# Allegro board power_amplifier.brd
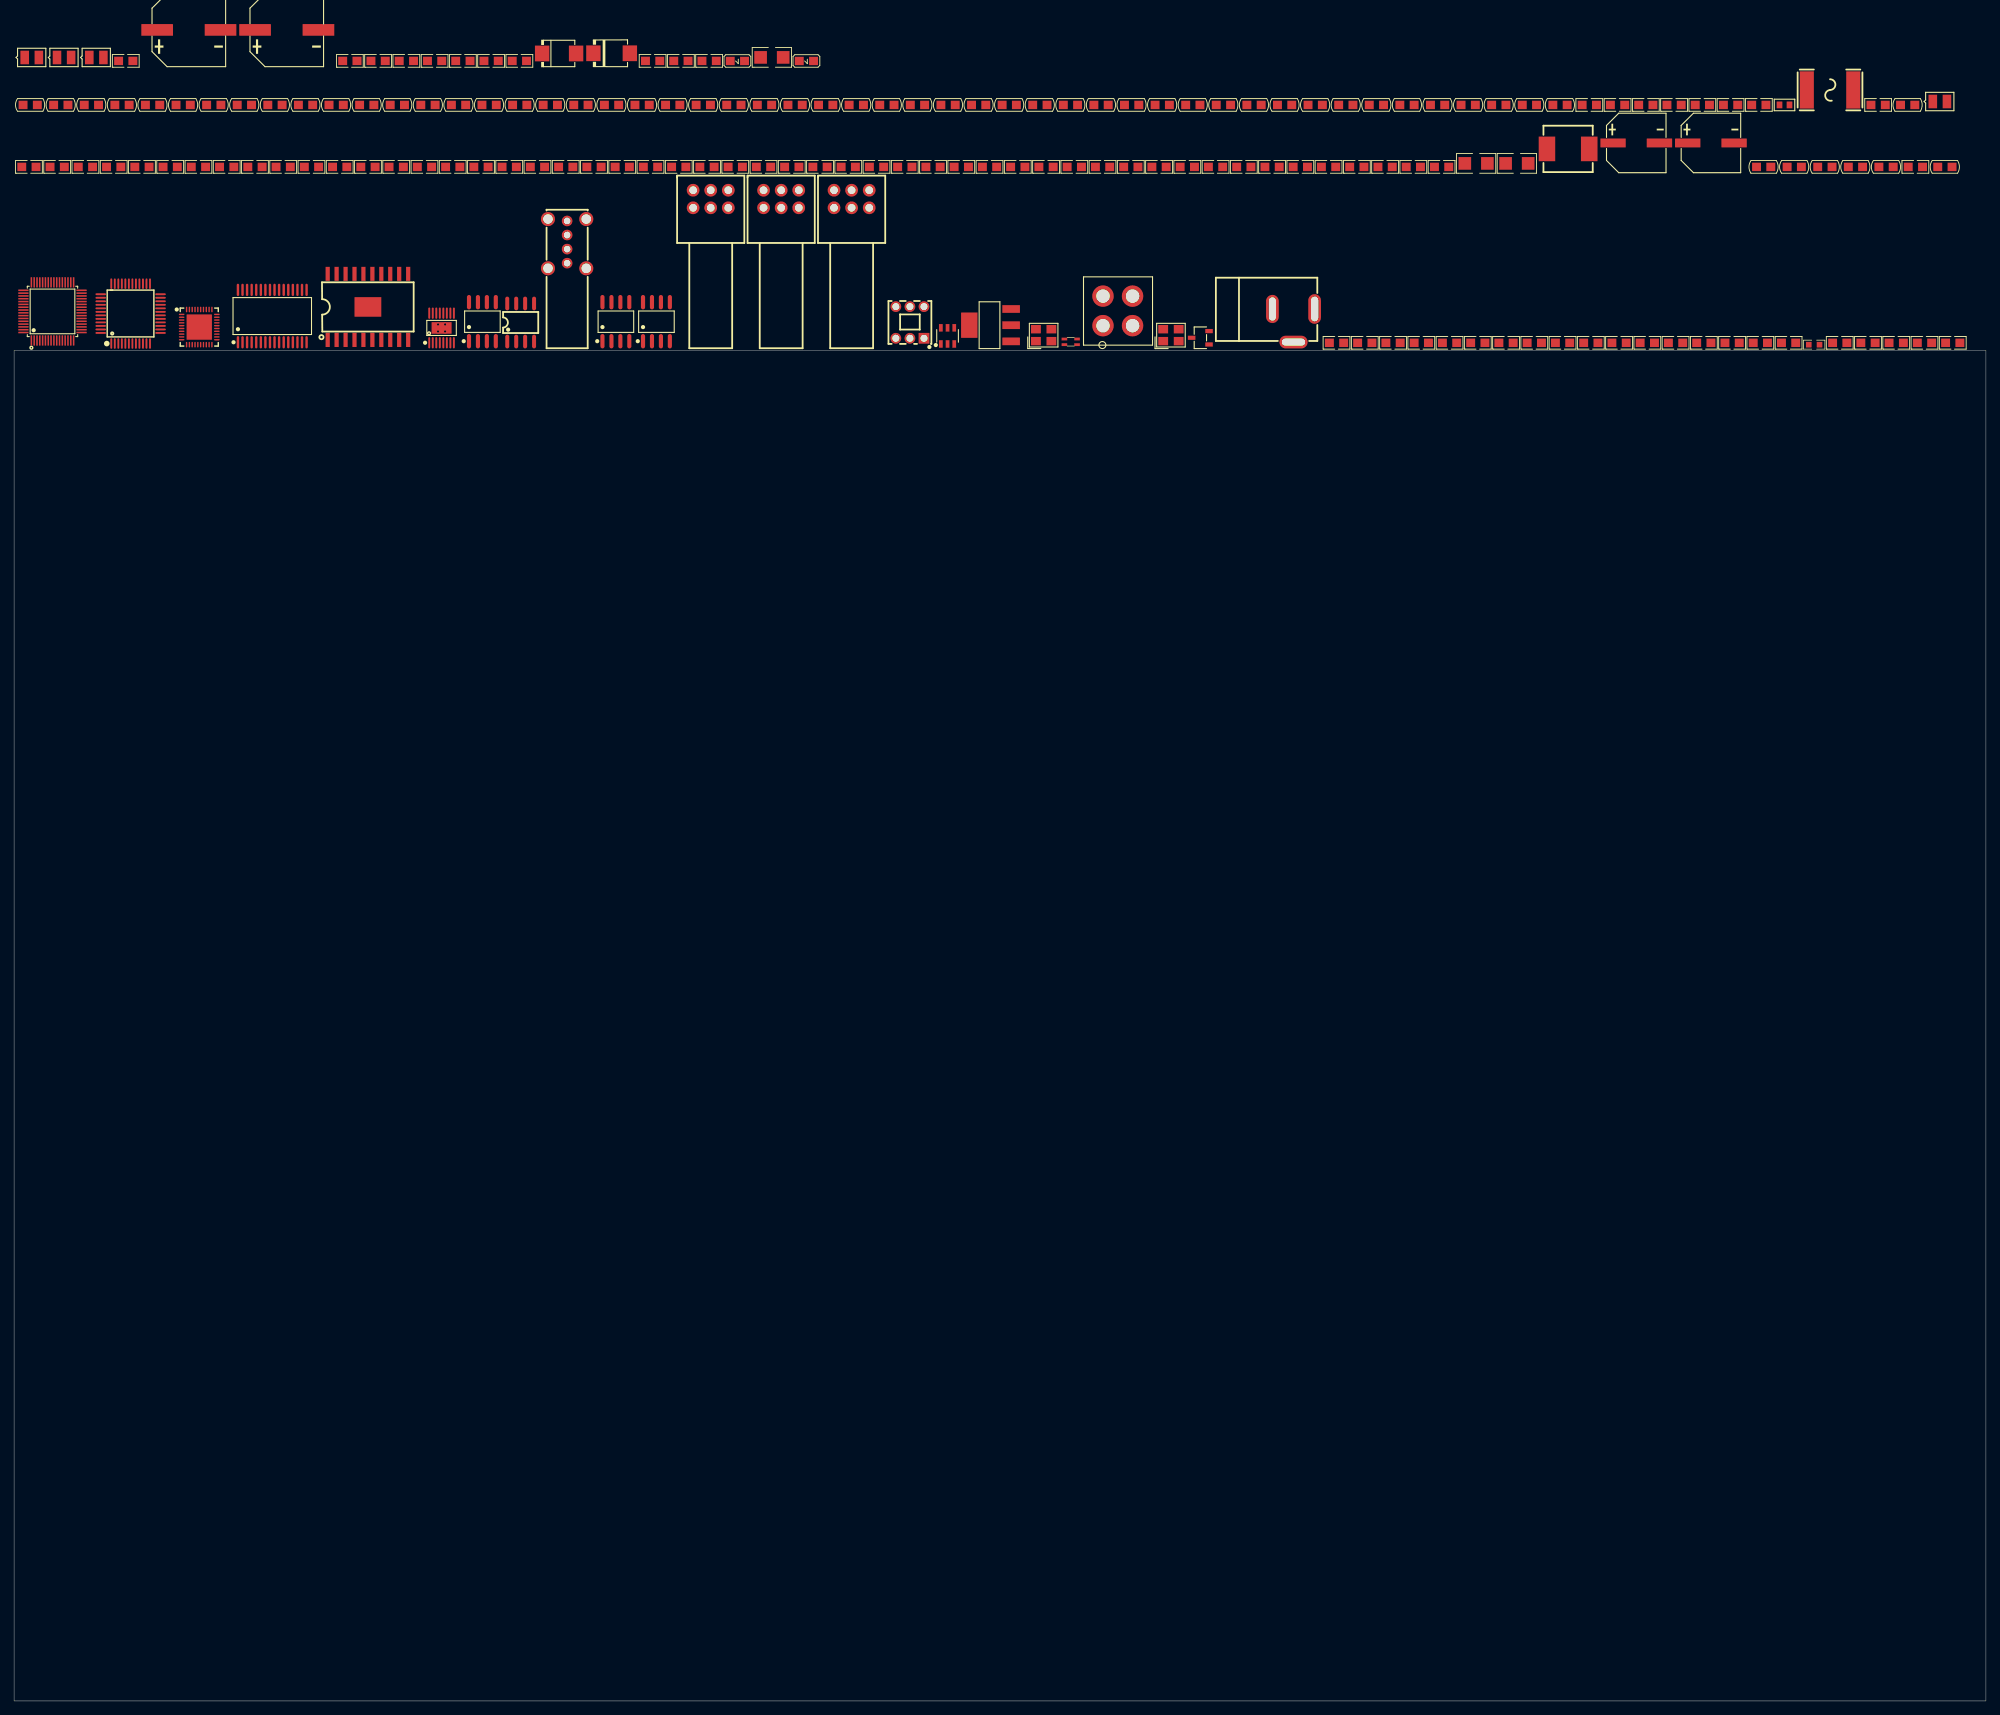
[diagram p0: board, top side]
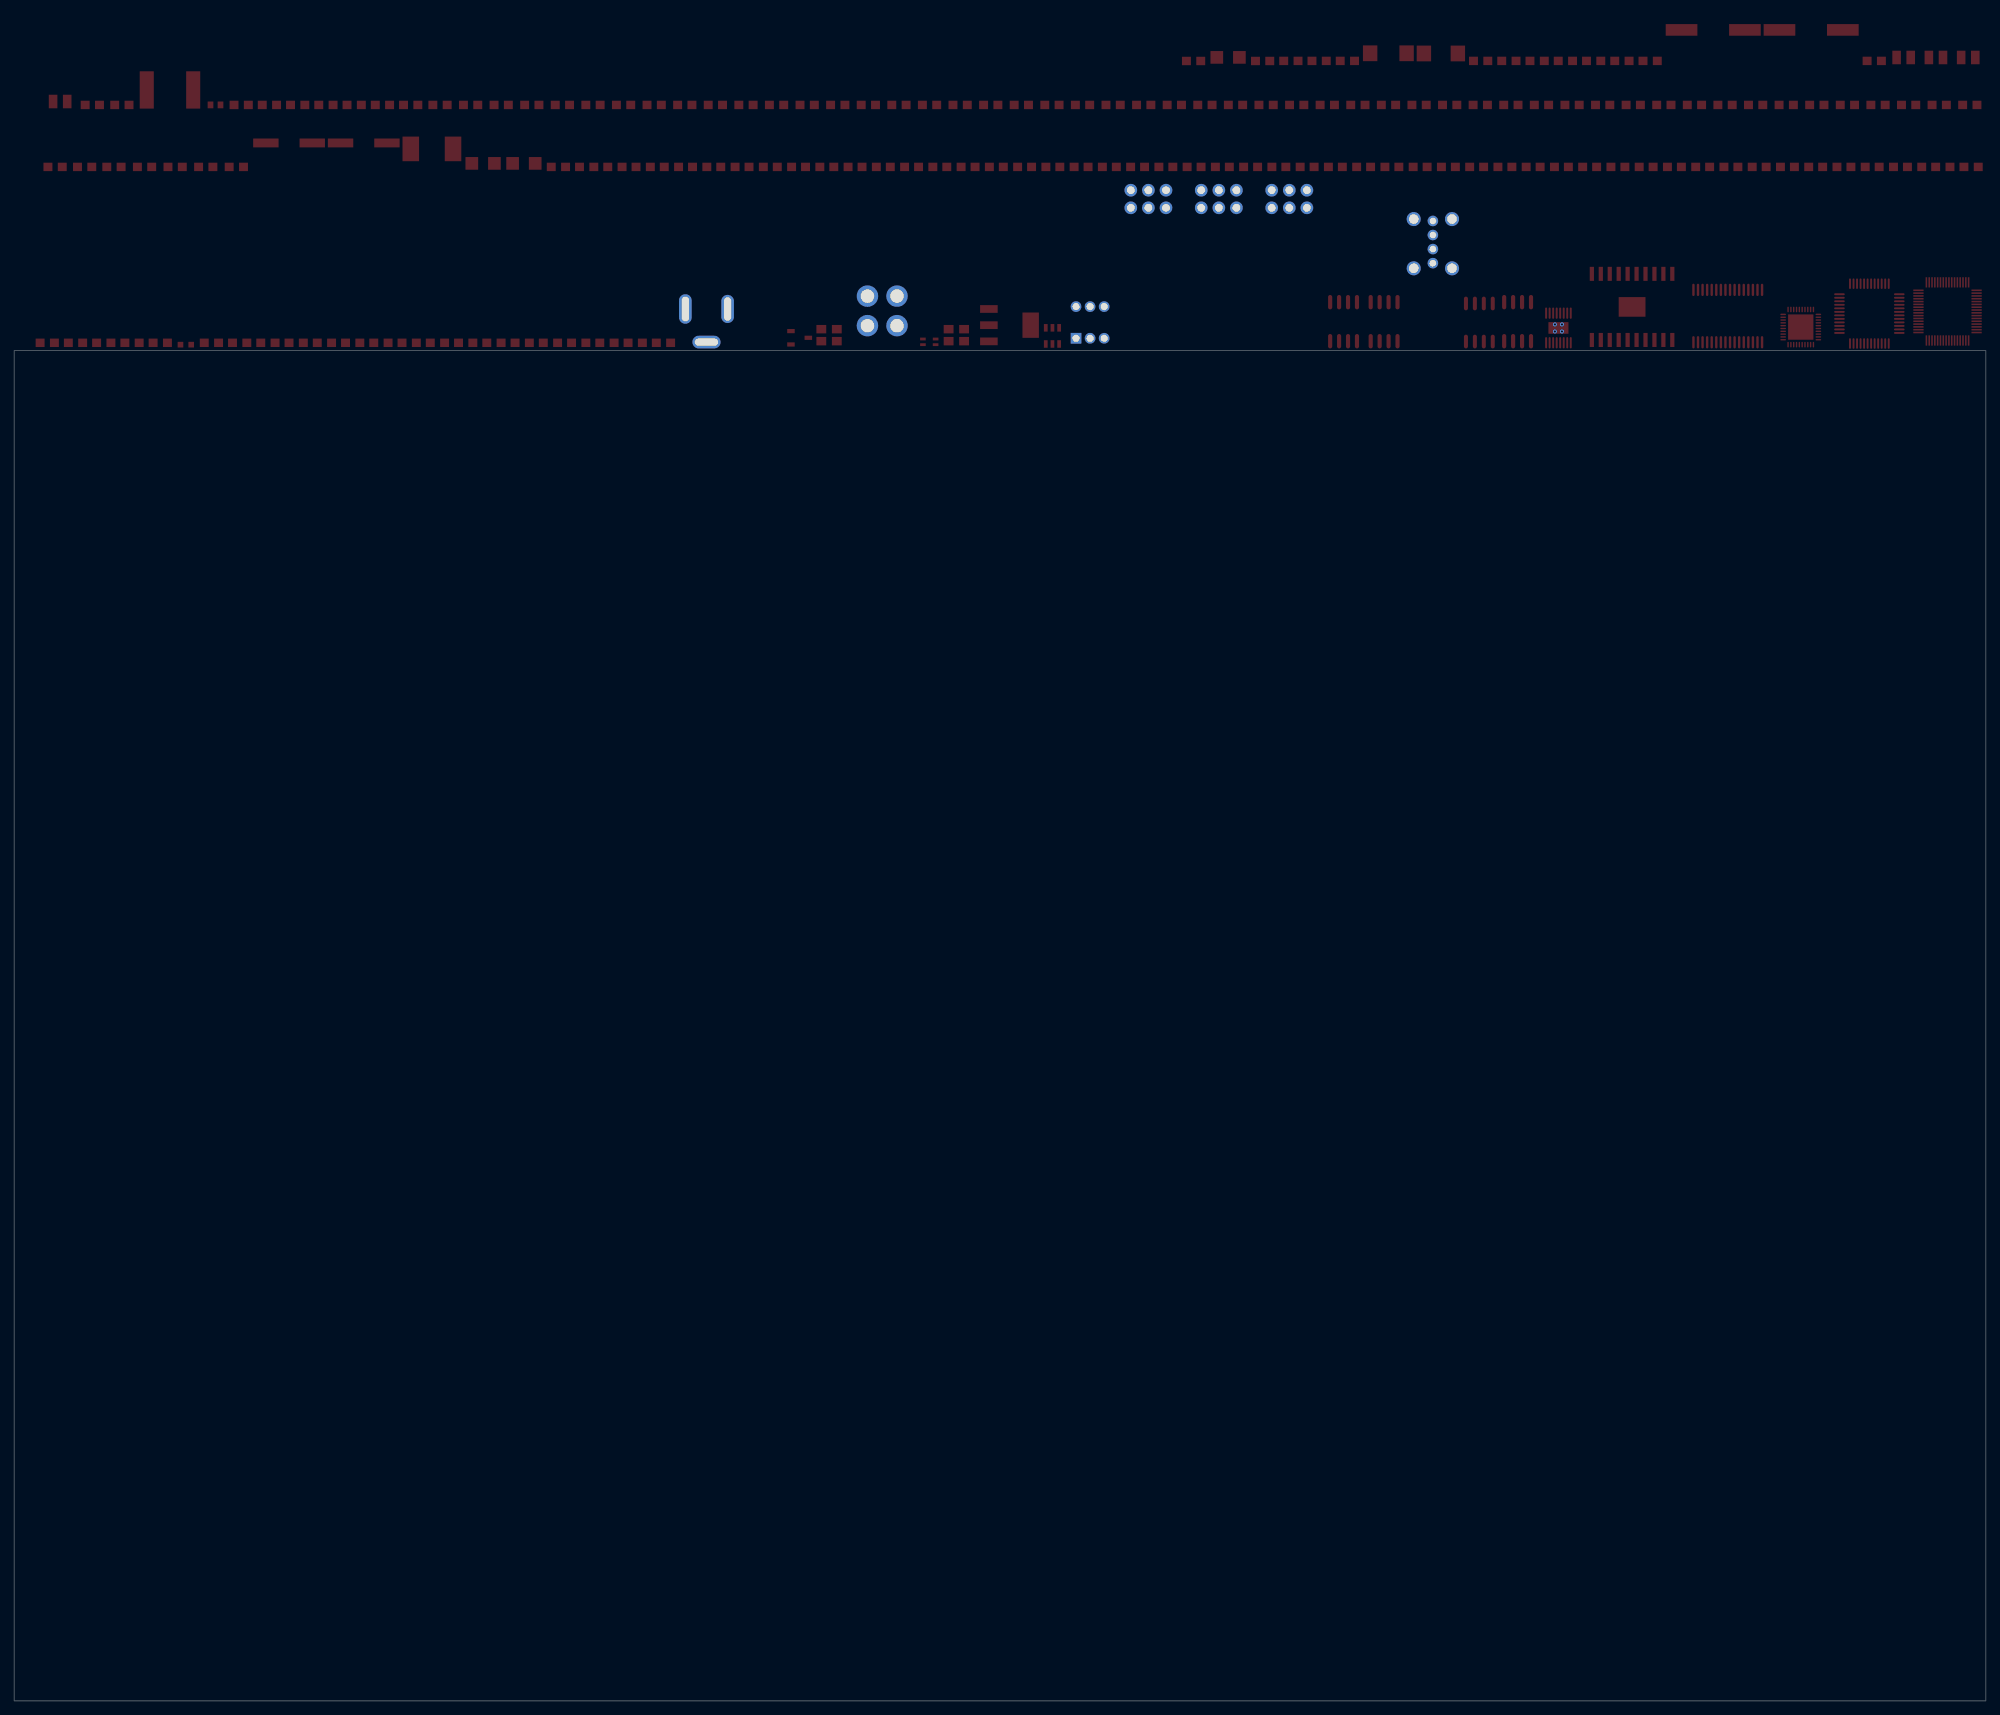
[diagram p1: board, bottom side, seen from below]

Outline 280.09 x 191.92 mm; copper layers: TOP, BOTTOM. Coordinates in mm from the lower left corner of the outline.
Outline path: 0,191.92 0,0 280.09,0 280.09,191.92 0,191.92

## Design rules (mm)
constraint set DEFAULT: min track width 0.127

## Placement (name value [footprint] x y rotation side)
C1  *  [C1206]  107.64 233.59 0 top
C2  *  [C0805]  207.91 193.02 0 top
C3  *  [C0805]  98.73 233.09 0 top
C4  *  [C1206]  207.67 218.52 0 top
C5  *  [C0805]  94.71 233.09 0 top
C6  *  [C1206]  213.46 218.52 0 top
C7  *  [C0805]  90.7 233.09 0 top
C8  *  [C0805]  142.57 218.02 0 top
C9  *  [C0805]  71.77 233.09 0 top
C10  *  [C0805]  227.98 193.02 0 top
C11  *  [C0805]  231.99 193.02 0 top
C12  *  [C0805]  146.58 218.02 0 top
C13  *  [C0805]  67.76 233.09 0 top
C14  *  [C0805]  63.75 233.09 0 top
C15  *  [C0805]  59.73 233.09 0 top
C16  *  [C0805]  58.29 218.02 0 top
C17  -  [CAP-SMD_BD10_0-L10_3-W10_3-FD]  24.82 237.5 0 top
C18  *  [C0805]  150.6 218.02 0 top
C19  -  [CAP-SMD_BD10_0-L10_3-W10_3-FD]  38.73 237.5 0 top
C20  *  [C0805]  55.72 233.09 0 top
C21  *  [C0805]  62.31 218.02 0 top
C22  *  [C0805]  66.32 218.02 0 top
C23  *  [C0805]  51.71 233.09 0 top
C24  *  [C0805]  47.69 233.09 0 top
C25  *  [C0805]  154.61 218.02 0 top
C26  *  [C0805]  158.62 218.02 0 top
C27  *  [C0805]  70.33 218.02 0 top
C28  *  [C0805]  110.46 218.02 0 top
C29  *  [C0805]  202.77 218.02 0 top
C30  *  [C0805]  162.64 218.02 0 top
C31  *  [C0805]  166.65 218.02 0 top
C32  *  [C0805]  244.03 193.02 0 top
C33  *  [C0805]  248.04 193.02 0 top
C34  *  [C0805]  252.06 193.02 0 top
C35  *  [C0805]  267.35 193.02 0 top
C36  *  [C0603]  255.69 192.76 0 top
C37  *  [C0805]  259.32 193.02 0 top
C38  *  [C0805]  263.33 193.02 0 top
C39  *  [C0805]  215.94 193.02 0 top
C40  *  [C0805]  54.28 218.02 0 top
C41  *  [C0805]  223.96 193.02 0 top
C42  *  [C0805]  271.36 193.02 0 top
C43  *  [C0805]  275.37 193.02 0 top
C44  *  [C0805]  15.86 233.09 0 top
C45  *  [C0805]  211.92 193.02 0 top
C46  *  [C0805]  264.78 226.83 0 top
C47  *  [C0805]  236 193.02 0 top
C48  *  [C0805]  240.02 193.02 0 top
C49  *  [C0805]  247.83 226.83 0 top
C50  *  [C0805]  243.82 226.83 0 top
C51  *  [C0805]  239.8 226.83 0 top
C52  *  [C0805]  235.79 226.83 0 top
C53  *  [C0805]  231.78 226.83 0 top
C54  *  [C0805]  227.76 226.83 0 top
C55  *  [C0805]  18.16 218.02 0 top
C56  *  [C0805]  22.17 218.02 0 top
C57  *  [C0805]  223.75 226.83 0 top
C58  *  [C0805]  270.07 218.02 0 top
C59  *  [C0805]  170.66 218.02 0 top
C60  *  [C0805]  174.68 218.02 0 top
C61  *  [C0805]  114.48 218.02 0 top
C62  *  [C0805]  118.49 218.02 0 top
C63  *  [C0805]  26.19 218.02 0 top
C64  *  [C0805]  30.2 218.02 0 top
C65  *  [C0805]  178.69 218.02 0 top
C66  *  [C0805]  182.7 218.02 0 top
C67  *  [C0805]  219.95 193.02 0 top
C68  *  [C0805]  187.85 193.02 0 top
C69  *  [C0805]  199.89 193.02 0 top
C70  *  [C0805]  195.87 193.02 0 top
C71  *  [C0805]  203.9 193.02 0 top
C72  *  [C0805]  191.86 193.02 0 top
C73  *  [C0805]  122.5 218.02 0 top
C74  *  [C0805]  126.52 218.02 0 top
C75  *  [C0805]  130.53 218.02 0 top
C76  *  [C0805]  134.54 218.02 0 top
C77  *  [C0805]  138.56 218.02 0 top
C78  *  [C0805]  78.36 218.02 0 top
C79  *  [C0805]  98.43 218.02 0 top
C80  *  [C0805]  34.21 218.02 0 top
C81  *  [C0805]  38.23 218.02 0 top
C82  *  [C0805]  102.44 218.02 0 top
C83  *  [C0805]  106.45 218.02 0 top
C84  -  [CAP-SMD_BD8_0-L8_3-W8_3-LS9_0-FD]  230.42 221.43 0 top
C85  -  [CAP-SMD_BD8_0-L8_3-W8_3-LS9_0-FD]  241.03 221.43 0 top
C86  *  [C0805]  186.72 218.02 0 top
C87  *  [C0805]  190.73 218.02 0 top
C88  *  [C0805]  194.74 218.02 0 top
C89  *  [C0805]  198.75 218.02 0 top
C90  *  [C0805]  2.11 218.02 0 top
C91  *  [C0805]  6.12 218.02 0 top
C92  *  [C0805]  10.13 218.02 0 top
C93  *  [C0805]  14.15 218.02 0 top
C94  *  [C0805]  42.24 218.02 0 top
C95  *  [C0805]  46.25 218.02 0 top
C96  *  [C0805]  50.27 218.02 0 top
C97  *  [C0805]  74.35 218.02 0 top
C98  *  [C0805]  82.37 218.02 0 top
C99  *  [C0805]  86.39 218.02 0 top
C100  *  [C0805]  90.4 218.02 0 top
C101  *  [C0805]  94.41 218.02 0 top
D1  -  [SOT-23-6_L2_9-W1_6-P0_95-LS2_8-BL]  132.59 194.01 0 top
D2  -  [DC-IN-TH_DC-005-5A-2_5]  181.73 195.48 0 top
D3  -  [SMB_L4_6-W3_6-LS5_4-RD]  77.42 234.14 0 top
F1  -  [F2920]  257.94 228.96 0 top
L1  *  [L0805]  112.54 233.08 0 top
L2  *  [L0805]  102.74 233.08 0 top
L3  -  [SMC0603]  250.76 226.83 0 top
L4  -  [IND-SMD_4P-L2_0-W1_2-TL]  150.09 193.16 0 top
L5  -  [IND-SMD_L7_3-W6_8]  220.74 220.58 0 top
L6  -  [SMD0805]  272.54 227.32 0 top
L7  -  [SMD0805]  1.51 233.58 0 top
L8  -  [SMD0805]  6.1 233.58 0 top
L9  -  [SMD0805]  10.68 233.58 0 top
R1  *  [R0805]  24.02 226.83 0 top
R2  *  [R0805]  28.36 226.83 0 top
R3  *  [R0805]  32.71 226.83 0 top
R4  *  [R0805]  37.06 226.83 0 top
R5  *  [R0805]  106.59 226.83 0 top
R6  *  [R0805]  102.25 226.83 0 top
R7  *  [R0805]  41.4 226.83 0 top
R8  *  [R0805]  193.51 226.83 0 top
R9  *  [R0805]  197.86 226.83 0 top
R10  *  [R0805]  202.2 226.83 0 top
R11  *  [R0805]  45.75 226.83 0 top
R12  *  [R0805]  50.09 226.83 0 top
R13  *  [R0805]  54.44 226.83 0 top
R14  *  [R0805]  58.79 226.83 0 top
R15  *  [R0805]  206.55 226.83 0 top
R16  *  [R0805]  128.32 226.83 0 top
R17  *  [R0805]  132.67 226.83 0 top
R18  *  [R0805]  137.01 226.83 0 top
R19  *  [R0805]  141.36 226.83 0 top
R20  *  [R0805]  63.13 226.83 0 top
R21  *  [R0805]  184.82 226.83 0 top
R22  *  [R0805]  76.17 226.83 0 top
R23  *  [R0805]  189.16 226.83 0 top
R24  *  [R0805]  80.52 226.83 0 top
R25  *  [R0805]  210.89 226.83 0 top
R26  *  [R0805]  67.48 226.83 0 top
R27  *  [R0805]  71.82 226.83 0 top
R28  *  [R0805]  154.4 226.83 0 top
R29  *  [R0805]  158.74 226.83 0 top
R30  *  [R0805]  110.94 226.83 0 top
R31  *  [R0805]  115.28 226.83 0 top
R32  *  [R0805]  248.52 218.02 0 top
R33  *  [R0805]  252.86 218.02 0 top
R34  *  [R0805]  257.21 218.02 0 top
R35  *  [R0805]  261.55 218.02 0 top
R36  *  [R0805]  119.63 226.83 0 top
R37  -  [RES-ADJ-TH_RK09712200MY]  118.97 213.46 0 top
R38  *  [R0805]  123.97 226.83 0 top
R39  -  [RES-ADJ-TH_RK09712200MY]  98.95 213.46 0 top
R40  *  [R0805]  265.9 218.02 0 top
R41  *  [R0805]  268.97 226.83 0 top
R42  *  [R0805]  274.26 218.02 0 top
R43  *  [R0805]  2.29 226.83 0 top
R44  -  [RES-ADJ-TH_RK09712200MY]  108.96 213.46 0 top
R45  *  [R0805]  215.24 226.83 0 top
R46  *  [R0805]  6.63 226.83 0 top
R47  *  [R0805]  10.98 226.83 0 top
R48  *  [R0805]  219.59 226.83 0 top
R49  *  [R0805]  15.33 226.83 0 top
R50  *  [R0805]  19.67 226.83 0 top
R51  *  [R0805]  145.7 226.83 0 top
R52  *  [R0805]  150.05 226.83 0 top
R53  *  [R0805]  84.86 226.83 0 top
R54  *  [R0805]  89.21 226.83 0 top
R55  *  [R0805]  97.9 226.83 0 top
R56  *  [R0805]  93.55 226.83 0 top
R57  *  [R0805]  163.09 226.83 0 top
R58  *  [R0805]  167.43 226.83 0 top
R59  *  [R0805]  171.78 226.83 0 top
R60  *  [R0805]  176.13 226.83 0 top
R61  *  [R0805]  180.47 226.83 0 top
S1  -  [SW-TH_5_8ZSGT]  127.25 195.92 0 top
U1  -  [HTQFP-64_L7_0-W7_0-P0_40-LS9_2-BL-EP3_6]  5.46 197.48 0 top
U2  -  [SOIC-8_L5_0-W4_0-P1_27-LS6_0-BL]  71.96 195.91 0 top
U3  -  [USB-TH_73725-0110BLF]  78.56 207.11 0 top
U4  -  [SOT-223-3_L6_5-W3_4-P2_30-LS7_0-BR]  138.65 195.53 0 top
U5  -  [SOT-23-3_L2_9-W1_6-P1_90-LS2_8-BR]  168.5 193.74 0 top
U6  -  [SMB_L4_3-W3_6-LS5_4-RD]  84.88 234.17 0 top
U7  -  [MSOP-16_L4_0-W3_0-P0_50-LS4_9-BL-EP]  60.72 195.14 0 top
U8  -  [QFN-40_L5_0-W5_0-P0_40-TL-EP3_6]  26.3 195.26 0 top
U9  -  [5557_4PIN]  156.77 197.56 0 top
U10  -  [LQFP-48_L7_0-W7_0-P0_50-LS9_0-BL]  16.56 197.18 0 top
U11  -  [SOIC-8_L4_9-W3_9-P1_27-LS6_0-BL]  91.24 196.02 0 top
U12  -  [SOIC-8_L4_9-W3_9-P1_27-LS6_0-BL]  66.52 196.02 0 top
U13  -  [SOIC-8_L4_9-W3_9-P1_27-LS6_0-BL]  85.48 196.02 0 top
U14  -  [HSOP-20_L12_9-W7_5-P1_27-BL-EP]  50.26 198.13 0 top
U15  -  [HTSSOP-32_L11_0-W6_1-P0_65-LS8_1-BL]  36.67 196.82 0 top
X1  -  [CRYSTAL-SMD_4P-L3_2-W2_5-BL]  164.32 194.11 0 top
X2  -  [CRYSTAL-SMD_4P-L3_2-W2_5-BL]  146.24 194.11 0 top

## Library data of the parts
C1 C4 C6 = C3216X7R1C106KT000N
C2 C45 = C: part number: C-0805B475K500NT,4.7UF
C3 C5 C7 C9 C13-C15 C20 C23 C24 C44 C46 C49-C54 C57 C58 C67-C72 = C: part number: C-0805B104K500NT,0.1UF
C8 C12 C18 C25 C26 C30 C31 = C: part number: C-CL21B106KOQNNNE,10UF
C10 C11 C47 C48 = C: part number: C-CC0805JRNPO9BN300,30PF
C16 C21 C22 = C: part number: C-CGA0805X5R226M350MT,22UF
C17 C19 = MA35V470M10X13: Tolerance: .TOL; User Part Number: .PARTNO
C27 C29 C78 C98-C101 = C: part number: C-CL21B103KBANNNC,10NF
C28 C61 C62 C73-C77 = C: part number: C-CL21B105KBFNNNE,1UF
C32-C35 C37 C38 C40 C42 C43 = C: part number: C-CC0805KKX7R9BB225,2.2UF
C36 = C: part number: C-C1608X5R0J156MT000E,15UF
C39 C41 = C: part number: C-0805CG0R1C500NT,0.1PF
C55 C56 C63 C64 C80 C81 C94-C97 = C: part number: C-CC0805KRX7R9BB102,1NF
C59 C60 C65 C66 = C: part number: C-CL21B223KBANNNC,22NF
C79 C82 C83 = C: part number: C-CL21B104KBCNNNC,100NF
C84 C85 = MA35V220M8X8: Tolerance: .TOL; User Part Number: .PARTNO
C86-C89 = C: part number: C-CL21B224KBFNNNE,220NF
C90-C93 = C: part number: C-CC0805KKX7R9BB684,680NF
D1 = USBLC6-2SC6: Tolerance: .TOL; User Part Number: .PARTNO
D2 = DC-005-5A: Tolerance: .TOL; User Part Number: .PARTNO
D3 = SMBJ30A_C19077584: Tolerance: .TOL; User Part Number: .PARTNO
F1 = BSMD2920-300-33V: Tolerance: .TOL; User Part Number: .PARTNO
L1 L2 = BLM21PG300SN1D
L3 = BLM18PG121SN1D_C14709
L4 = ACM2012-900-2P-T002: Tolerance: .TOL; User Part Number: .PARTNO
L5 = FXL0630-100-M: User Part Number: .PARTNO; Tolerance: .TOL
L6-L9 = L0805
R1-R4 R7 R11-R14 R20 R26 R27 = R: part number: R-0805W8F1002T5E,10K
R5 = R: part number: R-0805W8F2700T5E,270
R6 = R: part number: R-0805W8F220JT5E,22
R8-R10 R15 R25 = R: part number: R-RE0805FAR000,0
R16-R19 = R: part number: R-0805W8F330JT5E,33
R21 R23 = R: part number: R-FRC0805F9093TS,909K
R22 R24 R53 R54 R56 = R: part number: R-0805W8F1003T5E,100K
R28 R29 = R: part number: R-0805W8F4701T5E,4.7K
R30 R31 R36 R38 = R: part number: R-0805W8F3301T5E,3.3K
R32-R35 R40-R43 R46 R47 R49 R50 = R: part number: R-0805W8F1001T5E,1K
R37 R39 R44 = RK09712200MY: Tolerance: .TOL; User Part Number: .PARTNO
R45 R48 = R: part number: R-TD05G50R0BT,50
R51 R52 = R: part number: R-0805W8F390JT5E,39
R55 = R: part number: R-0805W8F2002T5E,20K
R57-R61 = R: part number: R-FRC0805F3R30TS,3.3
S1 = 5.8 ZSGT: Tolerance: .TOL; User Part Number: .PARTNO
U1 = SA9227A: Tolerance: .TOL; User Part Number: .PARTNO
U2 = AT24C64D-SSHM-T: Tolerance: .TOL; User Part Number: .PARTNO
U3 = HC-USB2.0-L195-P: Tolerance: .TOL; User Part Number: .PARTNO
U4 = AMS1117-3.3: Tolerance: .TOL; User Part Number: .PARTNO
U5 = XC6206P182MR: Tolerance: .TOL; User Part Number: .PARTNO
U6 = SS54_C5200096: Tolerance: .TOL; User Part Number: .PARTNO
U7 = LTC3260: Tolerance: .TOL; User Part Number: .PARTNO
U8 = CS43198-CNZR: Tolerance: .TOL; User Part Number: .PARTNO
U9 = 5557_4PIN: part number: 5557_4PIN-5557_4PIN
U10 = STM32F103C8T6: Tolerance: .TOL; User Part Number: .PARTNO
U11-U13 = NE5532DR: Tolerance: .TOL; User Part Number: .PARTNO
U14 = TPA6120A2DWPR: Tolerance: .TOL; User Part Number: .PARTNO
U15 = TPA3116D2DAD: Tolerance: .TOL; User Part Number: .PARTNO
X1 X2 = X322512MSB4SI: Tolerance: .TOL; User Part Number: .PARTNO

## Footprints (pads in the part's own frame, mm; a bottom-side part is the same pattern mirrored in y, then rotated)
5557_4PIN
  round 3.048 hole 1.905: 1(-2.095,-2.095) 2(2.103,-2.095) 3(2.103,2.103) 4(-2.095,2.103)
C0603
  rect 0.8x0.8 smd: 1(-0.762,0) 2(0.762,0)
C0805
  rect 1.27x1.199 smd: 1(-1.016,0) 2(1.016,0)
C1206
  rect 1.801x1.801 smd: 1(-1.605,0) 2(1.605,0)
CAP-SMD_BD8_0-L8_3-W8_3-LS9_0-FD
  rect 3.609x1.26 smd: 1(-3.294,0) 2(3.294,0)
CAP-SMD_BD10_0-L10_3-W10_3-FD
  rect 4.501x1.651 smd: 1(-4.501,0) 2(4.501,0)
CRYSTAL-SMD_4P-L3_2-W2_5-BL
  rect 1.4x1.199 smd: 1(-1.1,-0.851) 2(1.1,-0.851) 3(1.1,0.851) 4(-1.1,0.851)
DC-IN-TH_DC-005-5A-2_5
  oval 1.801x4.201 hole 1.001x3.5: 1(3,2.352)
  oval 1.801x4 hole 1.001x3.299: 2(-3,2.352)
  oval 4x1.801 hole 3.299x1.001: 3(0,-2.352)
F2920
  rect 1.999x5.301 smd: 1(-3.299,0) 2(3.299,0)
HSOP-20_L12_9-W7_5-P1_27-BL-EP
  rect 0.599x1.999 smd: 1(-5.715,-4.699) 2(-4.445,-4.699) 3(-3.175,-4.699) 4(-1.905,-4.699) 5(-0.635,-4.699) 6(0.635,-4.699) 7(1.905,-4.699) 8(3.175,-4.699) 9(4.445,-4.699) 10(5.715,-4.699) 11(5.715,4.699) 12(4.445,4.699) 13(3.175,4.699) 14(1.905,4.699) 15(0.635,4.699) 16(-0.635,4.699) 17(-1.905,4.699) 18(-3.175,4.699) 19(-4.445,4.699) 20(-5.715,4.699)
  rect 3.81x2.789 smd: 21(0,0)
HTQFP-64_L7_0-W7_0-P0_40-LS9_2-BL-EP3_6
  rect 0.224x1.46 smd: 1(-3,-4.13) 2(-2.601,-4.13) 3(-2.2,-4.13) 4(-1.801,-4.13) 5(-1.4,-4.13) 6(-1.001,-4.13) 7(-0.599,-4.13) 8(-0.201,-4.13) 9(0.201,-4.13) 10(0.599,-4.13) 11(1.001,-4.13) 12(1.4,-4.13) 13(1.801,-4.13) 14(2.2,-4.13) 15(2.601,-4.13) 16(3,-4.13) 33(3,4.13) 34(2.601,4.13) 35(2.2,4.13) 36(1.801,4.13) 37(1.4,4.13) 38(1.001,4.13) 39(0.599,4.13) 40(0.201,4.13) 41(-0.201,4.13) 42(-0.599,4.13) 43(-1.001,4.13) 44(-1.4,4.13) 45(-1.801,4.13) 46(-2.2,4.13) 47(-2.601,4.13) 48(-3,4.13)
  rect 1.46x0.224 smd: 17(4.13,-3) 18(4.13,-2.601) 19(4.13,-2.2) 20(4.13,-1.801) 21(4.13,-1.4) 22(4.13,-1.001) 23(4.13,-0.599) 24(4.13,-0.201) 25(4.13,0.201) 26(4.13,0.599) 27(4.13,1.001) 28(4.13,1.4) 29(4.13,1.801) 30(4.13,2.2) 31(4.13,2.601) 32(4.13,3) 49(-4.13,3) 50(-4.13,2.601) 51(-4.13,2.2) 52(-4.13,1.801) 53(-4.13,1.4) 54(-4.13,1.001) 55(-4.13,0.599) 56(-4.13,0.201) 57(-4.13,-0.201) 58(-4.13,-0.599) 59(-4.13,-1.001) 60(-4.13,-1.4) 61(-4.13,-1.801) 62(-4.13,-2.2) 63(-4.13,-2.601) 64(-4.13,-3)
HTSSOP-32_L11_0-W6_1-P0_65-LS8_1-BL
  oval 0.343x1.748 smd: 1(-4.874,-3.724) 2(-4.224,-3.724) 3(-3.576,-3.724) 4(-2.926,-3.724) 5(-2.276,-3.724) 6(-1.626,-3.724) 7(-0.975,-3.724) 8(-0.325,-3.724) 9(0.325,-3.724) 10(0.975,-3.724) 11(1.626,-3.724) 12(2.276,-3.724) 13(2.926,-3.724) 14(3.576,-3.724) 15(4.224,-3.724) 16(4.874,-3.724) 17(4.874,3.724) 18(4.224,3.724) 19(3.576,3.724) 20(2.926,3.724) 21(2.276,3.724) 22(1.626,3.724) 23(0.975,3.724) 24(0.325,3.724) 25(-0.325,3.724) 26(-0.975,3.724) 27(-1.626,3.724) 28(-2.276,3.724) 29(-2.926,3.724) 30(-3.576,3.724) 31(-4.224,3.724) 32(-4.874,3.724)
IND-SMD_4P-L2_0-W1_2-TL
  rect 0.8x0.401 smd: 1(-0.902,0.399) 2(-0.899,-0.399) 3(0.899,-0.401) 4(0.902,0.401)
IND-SMD_L7_3-W6_8
  rect 2.349x3.5 smd: 1(-3,0) 2(3,0)
L0805
  rect 1.27x1.199 smd: 1(-1.016,0) 2(1.016,0)
LQFP-48_L7_0-W7_0-P0_50-LS9_0-BL
  oval 0.269x1.501 smd: 1(-2.751,-4.249) 2(-2.25,-4.249) 3(-1.75,-4.249) 4(-1.25,-4.249) 5(-0.749,-4.249) 6(-0.249,-4.249) 7(0.249,-4.249) 8(0.749,-4.249) 9(1.25,-4.249) 10(1.75,-4.249) 11(2.25,-4.249) 12(2.751,-4.249) 25(2.751,4.249) 26(2.25,4.249) 27(1.75,4.249) 28(1.25,4.249) 29(0.749,4.249) 30(0.249,4.249) 31(-0.249,4.249) 32(-0.749,4.249) 33(-1.25,4.249) 34(-1.75,4.249) 35(-2.25,4.249) 36(-2.751,4.249)
  oval 1.501x0.269 smd: 13(4.249,-2.751) 14(4.249,-2.25) 15(4.249,-1.75) 16(4.249,-1.25) 17(4.249,-0.749) 18(4.249,-0.249) 19(4.249,0.249) 20(4.249,0.749) 21(4.249,1.25) 22(4.249,1.75) 23(4.249,2.25) 24(4.249,2.751) 37(-4.249,2.751) 38(-4.249,2.25) 39(-4.249,1.75) 40(-4.249,1.25) 41(-4.249,0.749) 42(-4.249,0.249) 43(-4.249,-0.249) 44(-4.249,-0.749) 45(-4.249,-1.25) 46(-4.249,-1.75) 47(-4.249,-2.25) 48(-4.249,-2.751)
MSOP-16_L4_0-W3_0-P0_50-LS4_9-BL-EP
  oval 0.279x1.608 smd: 1(-1.75,-2.103) 2(-1.25,-2.103) 3(-0.749,-2.103) 4(-0.249,-2.103) 5(0.249,-2.103) 6(0.749,-2.103) 7(1.25,-2.103) 8(1.75,-2.103) 9(1.75,2.103) 10(1.25,2.103) 11(0.749,2.103) 12(0.249,2.103) 13(-0.249,2.103) 14(-0.749,2.103) 15(-1.25,2.103) 16(-1.75,2.103)
  rect 2.845x1.651 smd: 17(0,0)
QFN-40_L5_0-W5_0-P0_40-TL-EP3_6
  oval 0.8x0.201 smd: 1(-2.499,1.801) 2(-2.499,1.4) 3(-2.499,1.001) 4(-2.499,0.599) 5(-2.499,0.201) 6(-2.499,-0.201) 7(-2.499,-0.599) 8(-2.499,-1.001) 9(-2.499,-1.4) 10(-2.499,-1.801) 21(2.499,-1.801) 22(2.499,-1.4) 23(2.499,-1.001) 24(2.499,-0.599) 25(2.499,-0.201) 26(2.499,0.201) 27(2.499,0.599) 28(2.499,1.001) 29(2.499,1.4) 30(2.499,1.801)
  oval 0.201x0.8 smd: 11(-1.801,-2.499) 12(-1.4,-2.499) 13(-1.001,-2.499) 14(-0.599,-2.499) 15(-0.201,-2.499) 16(0.201,-2.499) 17(0.599,-2.499) 18(1.001,-2.499) 19(1.4,-2.499) 20(1.801,-2.499) 31(1.801,2.499) 32(1.4,2.499) 33(1.001,2.499) 34(0.599,2.499) 35(0.201,2.499) 36(-0.201,2.499) 37(-0.599,2.499) 38(-1.001,2.499) 39(-1.4,2.499) 40(-1.801,2.499)
  rect 3.599x3.599 smd: 41(0,0)
R0805
  rect 1.27x1.199 smd: 1(-1.016,0) 2(1.016,0)
RES-ADJ-TH_RK09712200MY
  round 1.801 hole 1.1: 1(-2.499,1.25) 2(0,1.25) 3(2.499,1.25) 4(-2.499,-1.25) 5(0,-1.25) 6(2.499,-1.25)
SMB_L4_3-W3_6-LS5_4-RD
  rect 2.047x2.24 smd: 1(-2.591,0) 2(2.591,0)
SMB_L4_6-W3_6-LS5_4-RD
  rect 2.047x2.24 smd: 1(-2.413,0) 2(2.413,0)
SMC0603
  rect 0.813x0.965 smd: 1(0,0) 2(1.422,0)
SMD0805
  rect 1.219x1.93 smd: A(2.007,0) C(0,0)
SOIC-8_L4_9-W3_9-P1_27-LS6_0-BL
  oval 0.589x2.045 smd: 1(-1.905,-2.774) 2(-0.635,-2.774) 3(0.635,-2.774) 4(1.905,-2.774) 5(1.905,2.774) 6(0.635,2.774) 7(-0.635,2.774) 8(-1.905,2.774)
SOIC-8_L5_0-W4_0-P1_27-LS6_0-BL
  oval 0.569x1.951 smd: 1(-1.905,-2.705) 2(-0.635,-2.705) 3(0.635,-2.705) 4(1.905,-2.705) 5(1.905,2.705) 6(0.635,2.705) 7(-0.635,2.705) 8(-1.905,2.705)
SOT-23-3_L2_9-W1_6-P1_90-LS2_8-BR
  rect 1.069x0.599 smd: 1(1.234,-0.95) 2(1.234,0.95) 3(-1.234,0)
SOT-23-6_L2_9-W1_6-P0_95-LS2_8-BL
  rect 0.533x1.072 smd: 1(-0.95,-1.148) 2(0,-1.148) 3(0.95,-1.148) 4(0.95,1.148) 5(0,1.148) 6(-0.95,1.148)
SOT-223-3_L6_5-W3_4-P2_30-LS7_0-BR
  rect 2.499x1.1 smd: 1(2.969,-2.301) 2(2.969,0) 3(2.969,2.301)
  rect 2.339x3.599 smd: 4(-2.969,0)
SW-TH_5_8ZSGT
  rect 1.524x1.524 hole 1.001: 1(1.999,-2.25)
  round 1.524 hole 1.001: 2(0,-2.25) 3(-1.999,-2.25) 4(1.999,2.25) 5(0,2.25) 6(-1.999,2.25)
USB-TH_73725-0110BLF
  round 1.501 hole 0.925x0.919: 1(0,-2.769) 2(0,-0.77) 3(0,1.229) 4(0,3.231)
  round 1.999 hole 1.351: 5(2.72,-3.5) 6(2.72,3.5) 7(-2.72,3.5) 8(-2.72,-3.5)

## Nets
GNDA: C25.1 C26.1 C27.1 C29.2(B) C30.2(B) C37.2(B) C38.1 C39.1 C40.1 C41.1 C42.1 C43.1 C53.2(B) C54.2(B) C55.2(B) C57.2(B) C58.2(B) C63.2(B) C67.1 C68.1 C69.1 C70.1 C71.2(B) C72.2(B) C74.1 C76.1 C77.1 C78.1 C79.2(B) C80.1 C81.1 C82.1 C83.1 C84.2 C85.2 C90.1 C91.2(B) C92.1 C93.2(B) C94.1 C95.2(B) C96.1 C97.2(B) C98.1 C99.2(B) C100.1 C101.2(B) R22.2(B) R24.2(B) R25.1 R44.1 R44.4 R47.2(B) R50.2(B) R53.1 R55.1 U8.8 U8.12 U8.15 U8.19 U11.3 U11.5 U14.21 U15.1 U15.9 U15.13 U15.14 U15.15 U15.22 U15.25 U15.28
GNDD: C1.2 C2.1 C3.2(B) C4.2 C5.1 C6.1 C7.2(B) C8.2(B) C9.2(B) C10.2(B) C11.2(B) C12.2(B) C13.1 C14.1 C15.1 C17.2 C19.2 C20.1 C21.1 C23.2(B) C24.2(B) C31.2(B) C44.2(B) C45.2(B) C46.1 C47.2(B) C48.2(B) C49.1 C50.1 C51.2(B) C52.2(B) D1.2 D2.2 D2.3 D3.2 R4.1 R5.1 R15.2(B) R25.2(B) R27.1 U1.2 U1.5 U1.17 U1.60 U1.61 U1.62 U1.63 U1.64 U2.1 U2.2 U2.3 U2.4 U2.7(WP) U3.4 U3.5 U3.6 U3.7 U3.8 U4.1 U5.1 U7.2 U7.14 U7.17 U8.13 U8.17 U8.22 U8.30 U8.35 U8.41 U9.2 U10.8 U10.23 U10.35 U10.47(VSS_3) X1.2 X1.4 X2.2 X2.4
PVCC: C78.2(B) C80.2(B) C81.2(B) C82.2(B) C83.2(B) C84.1 C85.1 R56.2(B) R57.1 S1.1 U15.17 U15.18 U15.19 U15.31 U15.32
VBUS_FILT: C8.1 C9.1 C16.2(B) L3.2 U4.3
VCC_AMP+: C30.1 C53.1 C58.1 C68.2(B) C69.2(B) C70.2(B) R21.1 U7.12 U11.8 U12.8 U13.8 U14.3 U14.18
VCC_AMP-: C25.2(B) C54.1 C57.1 C67.2(B) C71.1 C72.1 R23.1 U7.5 U11.4 U12.4 U13.4 U14.1 U14.20(RVCC-)
VCC_BUS: C19.1 C20.2(B) C31.1 L5.2 U7.1 U7.11 U7.13
VDD18_DAC: C36.2(B) C38.2(B) C39.2(B) C41.2(B) C43.2(B) U5.2(VOUT) U8.4 U8.7 U8.25 U8.31
VDD18_SA: C1.1 C2.2(B) L1.1 U1.8 U1.20 U1.28 U1.43 U1.58
VDD33_SA: C3.1 C7.1 C18.2(B) C22.1 C44.1 C45.1 C49.2(B) C50.2(B) C51.1 C52.1 L2.2 R1.1 R2.1 R3.1 R6.1 R7.1 R8.2(B) R11.1 R12.1 R13.1 R14.1 R20.2(B) R26.1 R28.2(B) R29.2(B) U1.4 U1.7 U1.13 U1.14 U1.29 U1.39 U1.44 U1.52 U1.56 U2.8 U4.2 U4.4(VOUT1) U5.3 U8.26 U9.1 U10.1 U10.9 U10.24 U10.36 U10.48
VDD33_SA_PLL: C6.2 R6.2(B) U1.21 U1.24 U1.26
-VA: C35.2(B) C37.1 U8.9
ADJ+: R21.2(B) R22.1 U7.15
ADJ-: R23.2(B) R24.1 U7.4
BOOT0: R27.2(B) U10.44
BYP+: C29.1 U7.16
BYP-: C27.2(B) U7.3
DAC_OUT_L: R30.1 U8.14
DAC_OUT_R: R36.1 U8.16
DAC_RST: U8.28 U10.40
DBCLK: R19.2(B) U8.32 U8.34
DBCLK_OUT: R19.1 U1.42
DC_IN: C15.2(B) C17.1 L5.1 U6.2
DDATA: R18.2(B) U8.2 U8.29
DDATA_OUT: R18.1 U1.45
DLRCK: R16.2(B) U8.38 U8.40
DLRCK_OUT: R16.1 U1.47
DMCLK: R17.2(B) U8.37
DMCLK_OUT: R17.1 U1.46
FILT+: C36.1 U8.5
FILT-: C35.1 U8.6
FLYC_VCP: C33.1 C34.2(B) U8.23
FLYN_VA: C32.2(B) U8.11
FLYN_VCP: C34.1 U8.20
FLYP_VA: C32.1 U8.10
FLYP_VCP: C33.2(B) U8.24
FS/HS: R4.2(B) U1.31
GPIO0: R1.2(B) U1.27
GPIO1: R2.2(B) U1.30
GPIO3: R3.2(B) U1.32
GPIO4: R7.2(B) U1.33
GPIO5: R11.2(B) U1.34
GPIO6: R12.2(B) U1.35
GPIO7: R13.2(B) U1.36
HEADPHONE_LPAN: R51.2(B)
HEADPHONE_RPAN: R52.2(B)
I2C_SCL: R29.1 U8.1 U10.42
I2C_SDA: R28.1 U8.39 U10.43
IACP/RST: R14.2(B) U1.37
L_BAX-: R37.5 R39.5 U11.2
LIN+: R45.1 U14.4
LIN-: R46.1 R47.1 U14.5
LINN: C76.2(B) U15.11
LINP: C75.2(B) U15.10
LOUT: R46.2(B) R51.1 U14.2
OUT_N_LEFT: C93.1 C97.1 L9.C(2) R61.1
OUT_N_RIGHT: C91.1 C95.1 L7.C(2) R59.1
OUT_P_LEFT: C92.2(B) C96.2(B) L8.C(2) R60.2(B)
OUT_P_RIGHT: C90.2(B) C94.2(B) L6.C(2) R58.2(B)
PD0-OSC_IN: C47.1 U10.5 X2.1
PD1-OSC_OUT: C48.1 U10.6 X2.3(OSC2)
PLL_GND: R15.1 U1.22 U1.23 U1.25
PRE_L: C56.2(B) C60.1 R33.1 U12.1 U12.2
PRE_OUT_L: C75.1 R45.2(B) U13.1 U13.2
PRE_OUT_R: C73.1 R48.2(B) U13.6 U13.7(OUT2)
PRE_R: C59.1 C64.2(B) R32.1 U12.6 U12.7(OUT2)
R_BAX-: R37.2 R39.2 U11.6
RIN+: R48.1 U14.17
RIN-: R49.1 R50.1 U14.16
RINN: C74.2(B) U15.5
RINP: C73.2(B) U15.4
ROUT: R49.2(B) R52.1 U14.19
S_MUTE: R53.2(B) S1.2 U15.12
SA_RESET: C12.1 R20.1 U1.38
SA_XI: C10.1 U1.18 X1.1
SA_XO: C11.1 U1.19(XO) X1.3(OSC2)
SCL: R10.2(B) U1.40 U2.6
SD_LR: R56.1 U15.2 U15.3
SDA: R9.2(B) U1.41 U2.5
STM32_NRST: C46.2(B) R26.2(B) U10.7
SWCLK: U9.4 U10.37
SWDIO: U9.3 U10.34
TONE_OUT_L: C66.2(B) R43.2(B) R44.3 U11.1
TONE_OUT_R: C65.2(B) R42.2(B) R44.6 U11.7(OUT2)
UNNAMED_2_BLM21PG300SN1D_I68_2: L1.2 U1.3
UNNAMED_2_C_I65_B: C4.1 C5.2(B) L2.1 U1.1
UNNAMED_2_R_I36_B: R5.2(B) U1.12
UNNAMED_2_R_I41_A: R8.1 U1.59
UNNAMED_2_R_I42_A: R9.1 U1.55
UNNAMED_2_R_I43_A: R10.1 U1.54
UNNAMED_5_BSMD2920-300-33V_I2_1: D3.1(K) F1.2 U6.1
UNNAMED_5_BSMD2920-300-33V_I25_: D2.1 F1.1
UNNAMED_5_C_I10_A: C13.2(B) C16.1
UNNAMED_5_C_I11_B: C22.2(B) C24.1
UNNAMED_5_C_I20_B: C21.2(B) C23.1
UNNAMED_5_C_I22_A: C14.2(B) C18.1
UNNAMED_5_C_I35_A: C28.1 U7.7
UNNAMED_5_C_I35_B: C28.2(B) U7.10
UNNAMED_8_C_I7_A: C55.1 R31.2(B) U12.3
UNNAMED_8_C_I8_A: C56.1 R30.2(B) R31.1
UNNAMED_8_C_I11_A: C64.1 R36.2(B) R38.1
UNNAMED_8_C_I12_A: C63.1 R38.2(B) U12.5
UNNAMED_8_C_I17_A: C61.1 R32.2(B) R37.3
UNNAMED_8_C_I17_B: C61.2(B) R37.1 R42.1
UNNAMED_8_C_I21_B: C59.2(B) R34.1
UNNAMED_8_C_I22_A: C65.1 R40.2(B)
UNNAMED_8_C_I27_A: C62.1 R33.2(B) R37.6
UNNAMED_8_C_I27_B: C62.2(B) R37.4 R43.1
UNNAMED_8_C_I28_A: C66.1 R41.2(B)
UNNAMED_8_C_I30_B: C60.2(B) R35.1
UNNAMED_8_R_I19_B: R34.2(B) R39.3
UNNAMED_8_R_I20_A: R39.1 R40.1
UNNAMED_8_R_I29_A: R39.4 R41.1
UNNAMED_8_R_I31_B: R35.2(B) R39.6
UNNAMED_11_C_I4_A: C79.1 R57.2(B)
UNNAMED_11_C_I11_B: C77.2(B) R54.2(B) U15.6 U15.7
UNNAMED_11_C_I16_A: C86.1 U15.30
UNNAMED_11_C_I16_B: C86.2(B) L6.A U15.29
UNNAMED_11_C_I17_A: C87.1 U15.26
UNNAMED_11_C_I17_B: C87.2(B) L7.A U15.27
UNNAMED_11_C_I18_A: C88.1 U15.24
UNNAMED_11_C_I18_B: C88.2(B) L8.A U15.23
UNNAMED_11_C_I19_A: C89.1 U15.20
UNNAMED_11_C_I19_B: C89.2(B) L9.A U15.21
UNNAMED_11_C_I36_A: C99.1 R59.2(B)
UNNAMED_11_C_I42_B: C98.2(B) R58.1
UNNAMED_11_C_I51_A: C101.1 R61.2(B)
UNNAMED_11_C_I52_B: C100.2(B) R60.1
UNNAMED_11_R_I12_A: R54.1 R55.2(B) U15.8
USB_5V0: D1.5 L3.1 U3.1
USB_DM_CONN: L4.4 U1.16
USB_DN: D1.4 L4.1 U3.2
USB_DP: D1.6 L4.2 U3.3
USB_DP_CONN: L4.3 U1.15
VCP_FILT+: C42.2(B) U8.21
VCP_FILT-: C40.2(B) U8.18
VOL_OUT_L: R44.2 U13.3
VOL_OUT_R: R44.5 U13.5
VOUT: C26.2(B) U7.6(VOUT)

Pads without a net: D1 1 3; S1 3 4 5 6; U1 6 9 10 11 48 49 50 51 53 57; U7 8 9; U8 3 27 33 36; U10 2 3 4 10 11 12 13 14 15 16 17 18 19 20 21 22 25 26 27 28 29 30 31 32 33 38 39 41 45 46; U14 6 7 8 9 10 11 12 13 14 15; U15 16

## Via types
v1: diameter 0.61, hole 0.305, TOP to BOTTOM, 4 vias

## Routing (per net, layer and track width the routed paths; a pad name or vN(x,y) marks a point on that pad's centre or on a via; arc(x,y) is an arc through that point)
GNDD:
  vias: v1(60.22,195.64) v1(60.22,194.64) v1(61.22,195.64) v1(61.22,194.64)
